# Altium PCB Main.PcbDoc
Units mm, origin at the board's own origin, x right, y up, seen from the top; angles counter-clockwise.
Board outline 144.19 x 139.09 mm, 3 copper layers (Top Layer, GND, Bottom Layer), stack 0.617 mm thick; 25 components, 20 nets, 103 pads, 1 vias.
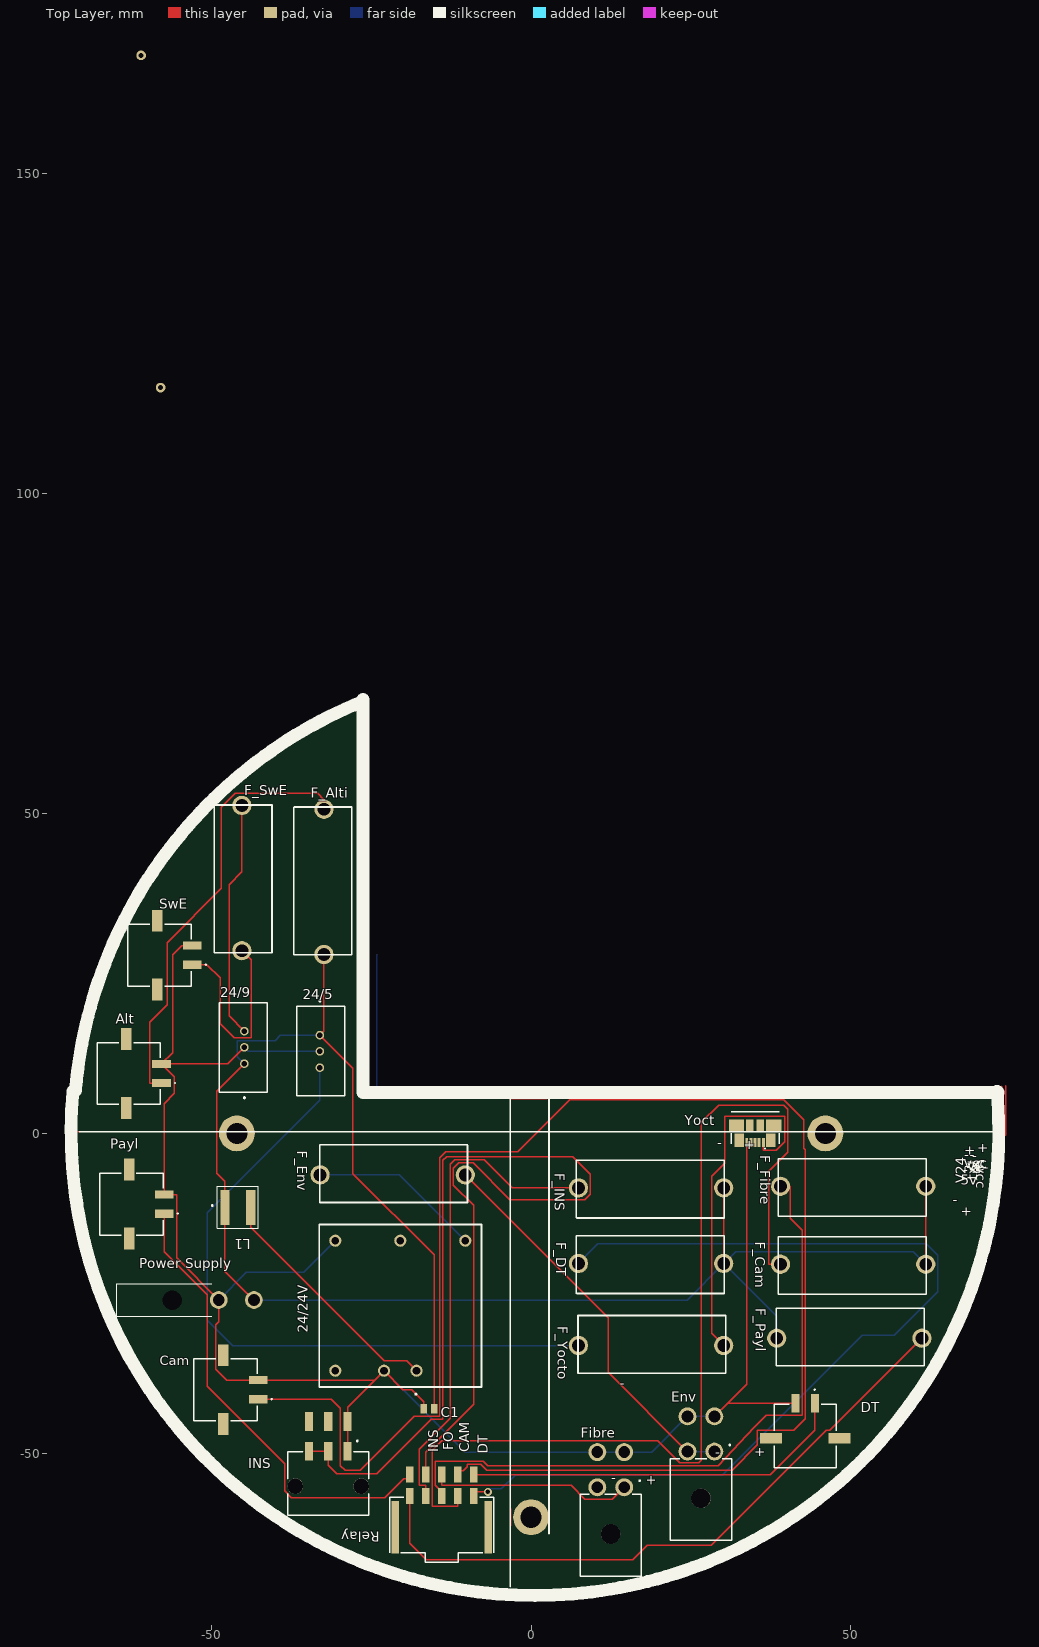
[diagram p0: Top Layer view]
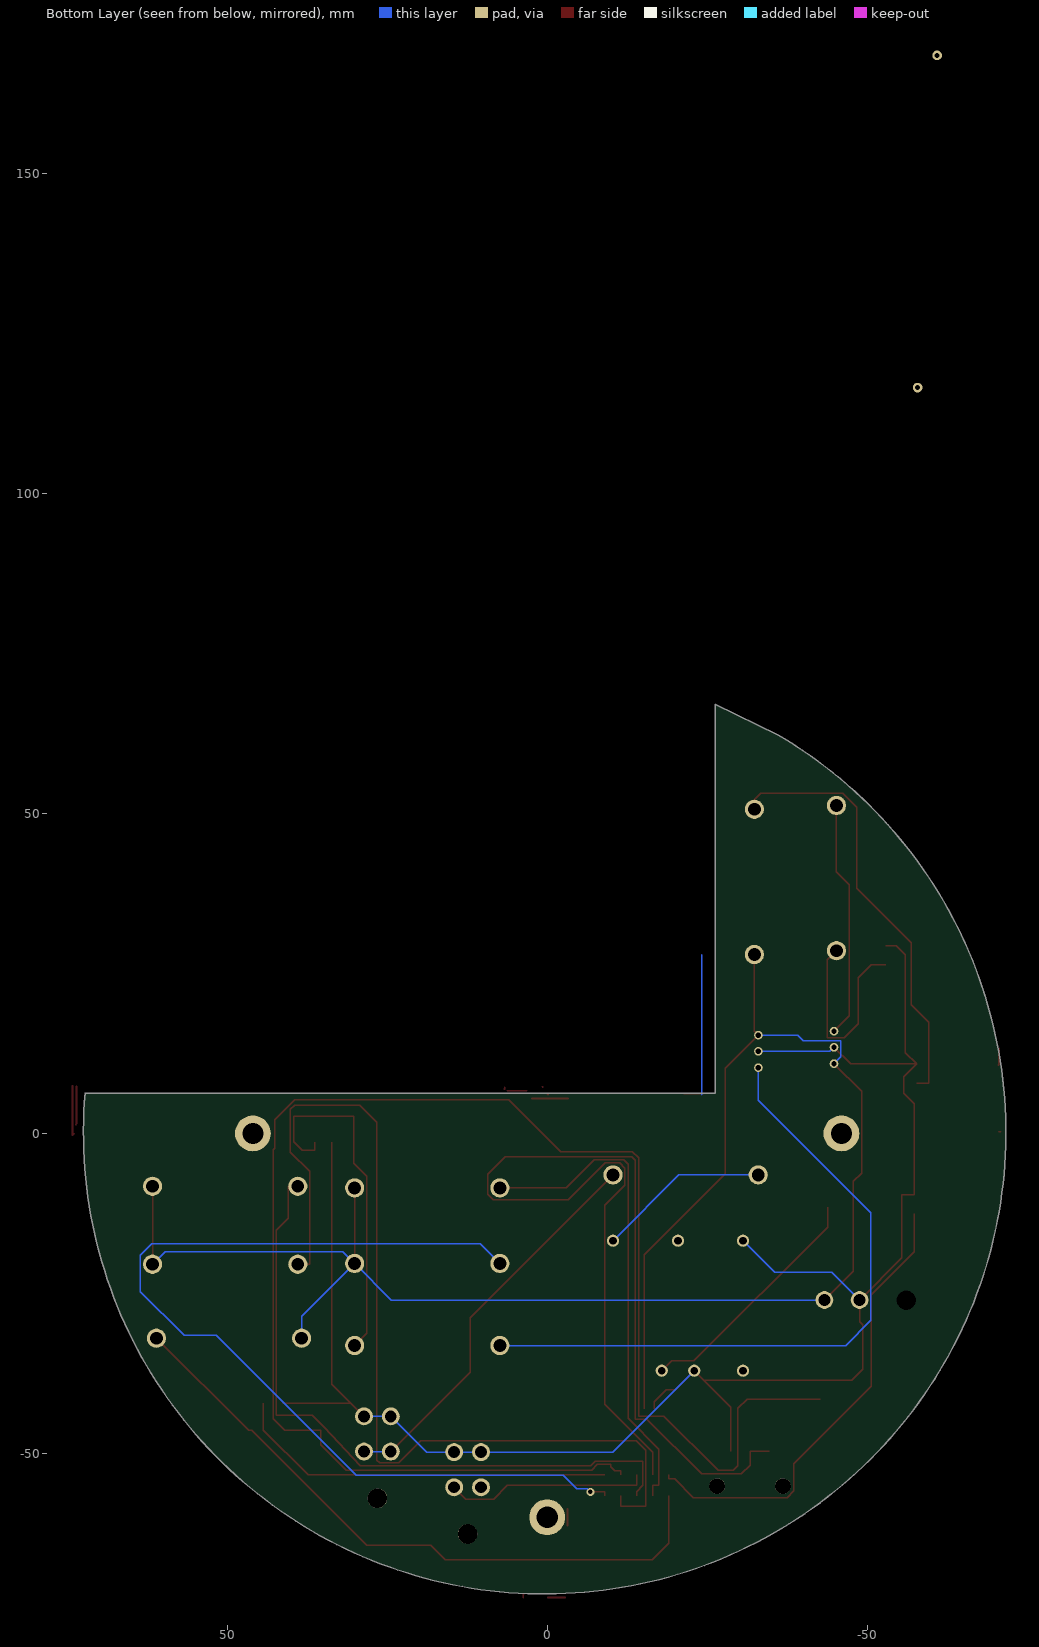
[diagram p1: Bottom Layer view, seen from below]
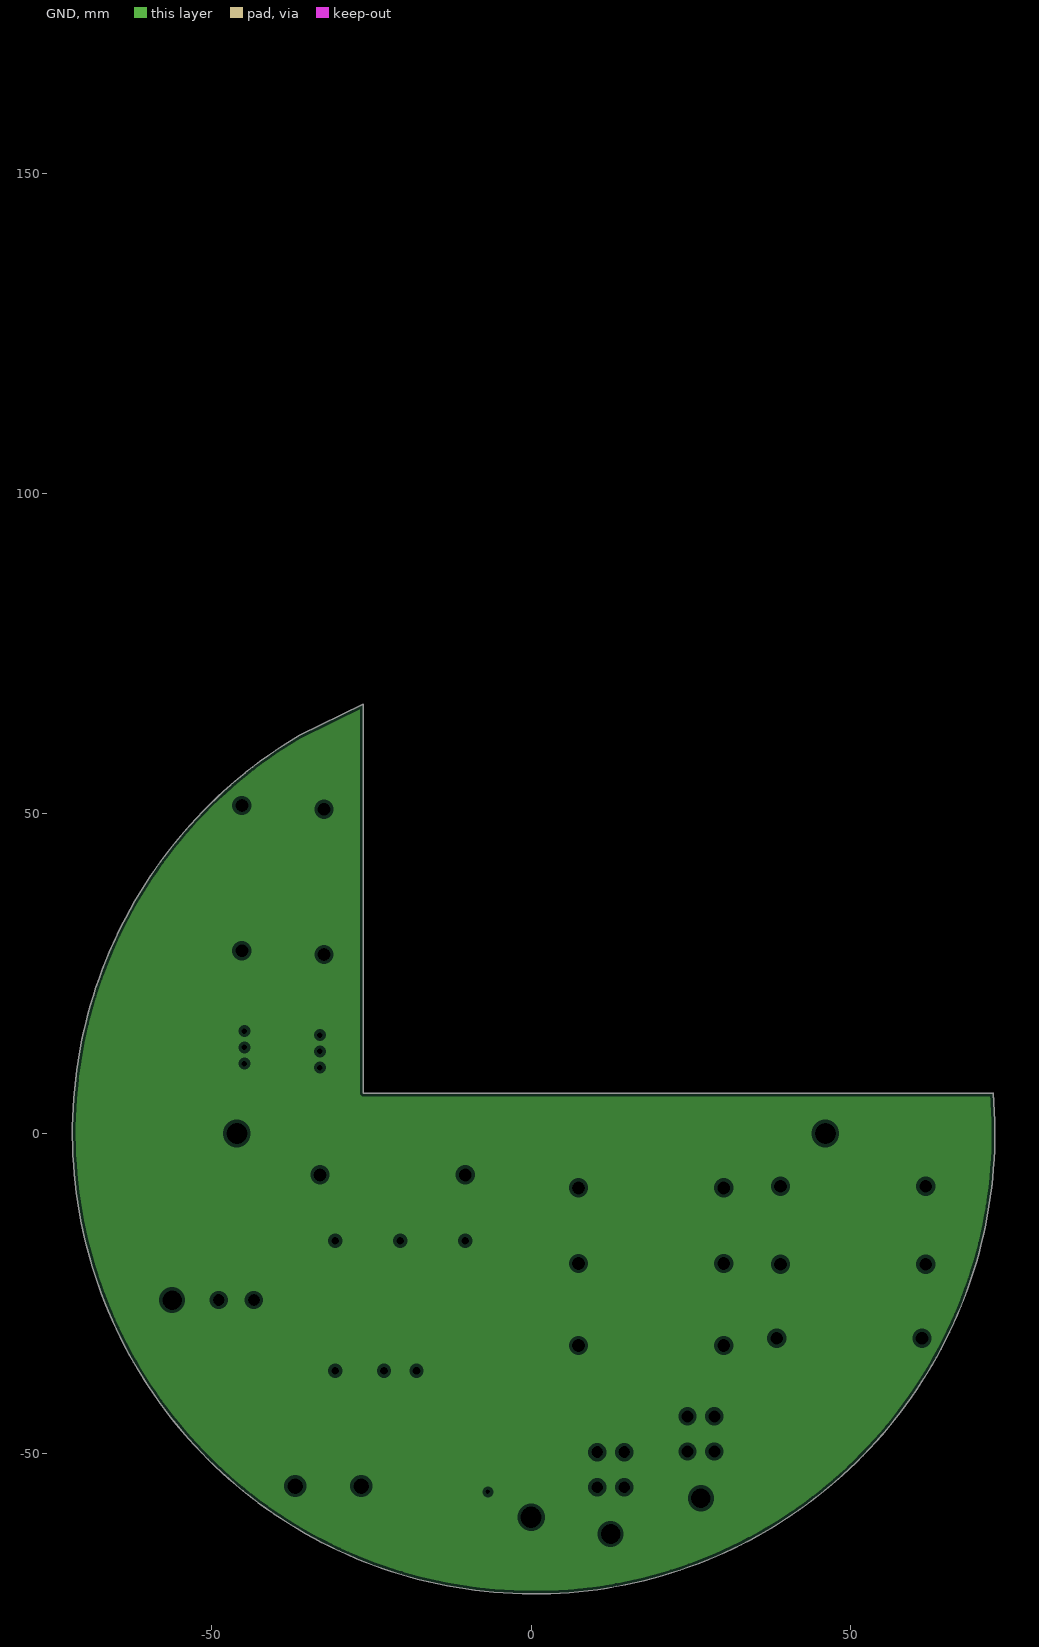
[diagram p2: GND, clearances drawn from the general rule]

## Layer stack, top to bottom
Top Solder: solder mask 0.0102, Solder Resist, Dk 3.5
Top Layer: signal copper 0.1
Dielectric 1: core 0.254, FR-4, Dk 4.2
GND: plane copper 0.036
Dielectric 2: prepreg 0.127, Dk 4.2
Bottom Layer: signal copper 0.1
Bottom Solder: solder mask 0.0102, Solder Resist, Dk 3.5

## Board outline
-26.247,6.319 -26.247,67.102 -36.183,62.237 ccw(c0.397,0.111) 72.224,6.319

## Design rules (kind name [scope] priority, off if disabled: settings)
Clearance [All] p1: gap=0.254 ignorepadtopadclearanceinfootprint=FALSE except(0: Arc-Hole Track-Hole SMDPad-Hole THPad-Hole Via-Hole Fill-Hole Poly-Hole Region-Hole Text-Hole)
PlaneClearance [All] p1: clearance=0.508
PlaneConnect [All] p1: planeconnectstyle=Relief reliefexpansion=0.508 reliefentries=4 reliefconductorwidth=0.254 reliefairgap=0.254
PolygonConnect [All] p1: connectstyle=Relief reliefconductorwidth=0.254 reliefentries=4 polygonreliefangle="90 Angle" airgapwidth=0.254
RoomDefinition Main [InComponentClass('Main')] p1 off: confinementstyle=ConfineIn formatcopy=TRUE lockcomponents=FALSE outline -73.542,-73.687 75.048,-73.687 75.048,70.712 -73.542,70.712
RoutingVias [All] p1: holewidth=0.711 width=1.27 viastyle="Through Hole" minholewidth=0.711 minwidth=1.27 maxholewidth=0.711 maxwidth=1.27
SMDNeckDown [All] p1: percent=100.000
SolderMaskExpansion [All] p1: expansion=0.102
Width "Schematic Width Constraint_1" [HasPad('24/5-2')] p1: maxlimit=0.3 minlimit=0.274 preferedwidth=0.275 minimp=50.000000 maximp=50.000000 favimp=50.000000
Width "Schematic Width Constraint" [HasPad('24/5-3')] p2: maxlimit=0.3 minlimit=0.274 preferedwidth=0.275 minimp=50.000000 maximp=50.000000 favimp=50.000000
Width Width_1 [All] p3 off: maxlimit=6 minlimit=6 preferedwidth=6 minimp=50.000000 maximp=50.000000 favimp=50.000000
Width [All] p4: maxlimit=0.225 minlimit=0.225 preferedwidth=0.225 minimp=50.000000 maximp=50.000000 favimp=50.000000
28 further rules are at their usual default settings.

## Components (designator, comment, footprint, x,y, rotation, side; value= is the part's Value field where it differs from the comment)
24/5 "TSR_2-2450" TSR-2 -29.13,19.867 r270 top
24/9 "TSR_2-2490" TSR-2 -48.721,6.422 r90 top
24/24V "THN_30-2415WI" THN_30 -20.447,-26.924 r0 top
Alt "43650-0212" 43650-0214 -67.855,9.374 r270 top (schematic designator Altimeter)
C1 "C0805S472K5RACAUTO" CAPC2012X88N -15.964,-43.053 r180 top
Cam "43650-0212" 43650-0214 -52.733,-40.056 r270 top (schematic designator Camera)
DT "43650-0212" 43650-0214 42.85,-52.225 r0 top (schematic designator Depth)
Env "26-01-3115" 39-30-1040 26.543,-63.623 r0 top (schematic designator Enviro)
F_Alti "FUSEHOLDERS PC Mount 5x20mm Fuses" "FUSEHOLDER 5x20" -32.385,27.973 r90 top (schematic designator F_Altimeter)
F_Cam "FUSEHOLDERS PC Mount 5x20mm Fuses" "FUSEHOLDER 5x20" 61.689,-20.447 r180 top
F_DT "FUSEHOLDERS PC Mount 5x20mm Fuses" "FUSEHOLDER 5x20" 30.099,-20.32 r180 top
F_Env "FUSEHOLDERS PC Mount 5x20mm Fuses" "FUSEHOLDER 5x20" -32.987,-6.477 r0 top
F_Fibre "FUSEHOLDERS PC Mount 5x20mm Fuses" "FUSEHOLDER 5x20" 61.689,-8.255 r180 top
F_INS "FUSEHOLDERS PC Mount 5x20mm Fuses" "FUSEHOLDER 5x20" 30.099,-8.509 r180 top
F_Payl "FUSEHOLDERS PC Mount 5x20mm Fuses" "FUSEHOLDER 5x20" 38.387,-32.004 r0 top (schematic designator F_Payload)
F_SwE "FUSEHOLDERS PC Mount 5x20mm Fuses" "FUSEHOLDER 5x20" -45.212,51.275 r270 top (schematic designator F_SwitchE)
F_Yocto "FUSEHOLDERS PC Mount 5x20mm Fuses" "FUSEHOLDER 5x20" 7.399,-33.147 r0 top
Fibre "26-01-3115" 39-30-1040 12.446,-69.211 r0 top
INS "43045-0606" 43045-0606 -31.702,-49.657 r0 top
L1 "XEL6060-222MEB" XAL6060153MEC -45.847,-11.557 r0 top
Payl "43650-0212" 43650-0214 -67.437,-11.049 r270 top (schematic designator Payload)
"Power Supply" "76825-0002" 768250002 -54.034,-26.035 r270 top
Relay "105405-1110" 105405-1110 -13.97,-65.54 r0 top
SwE "43650-0212" 43650-0214 -63.02,27.864 r270 top (schematic designator SwitchE)
Yoct "47346-0001" 47346-0001 35,3.42 r0 top (schematic designator 5V)

## Footprints (in the part's own frame and the unit in brackets; to place one, negate y for a bottom-side part, rotate by r counter-clockwise, add the part's x,y. Pads: shape width x height; smd on the part's side, far side on the other; paste and mask are expansions set on the pad)
39-30-1040 [mm]
  round 2.8 hole 1.85: 1(2.1,13.9) 2(-2.1,13.9) 3(2.1,19.4) 4(-2.1,19.4)
  round 3.05 hole 3.05 unplated: 5(0,6.6)
  silkscreen extent -4.8,0 4.8,15.02, body extent -4.93,0 5.07,19.94, height 12.4
43045-0606 [mm]
  rect 1.27x2.92 smd: 1(3,0) 2(0,0) 3(-3,0) 4(3,4.63) 5(0,4.63) 6(-3,4.63)
  round 2.46 hole 2.46 unplated: 7(-5.15,-5.47) 8(5.15,-5.47)
  silkscreen extent -6.33,-9.99 6.33,1.69, body extent -6.57,-10.16 6.58,5.24, height 8.83
43650-0214 [mm]
  rect 1.27x2.92 smd: 1(1.5,10.07) 2(-1.5,10.07)
  rect 3.43x1.65 smd: 3(-5.385,4.6) 4(5.385,4.6)
  silkscreen extent -4.83,0 4.83,12.24, body extent -6.82,0 6.83,10.74, height 5.64
47346-0001 [mm]
  rect 0.45x1.38 smd: 1(1.3,-4.81) 2(0.65,-4.81) 3(0,-4.81) 4(-0.65,-4.81) 5(-1.3,-4.81)
  rect 1.475x2.1 smd: 6(-2.453,-4.45) 7(2.452,-4.45)
  rect 1.175x1.9 smd: 8(0.837,-2.15) 9(-0.837,-2.15)
  rect 2.375x1.9 smd: 10(2.913,-2.15) 11(-2.913,-2.15)
  silkscreen extent -3.75,-5.84 3.75,0, body extent -3.99,-5.19 3.99,0.24, height 2.77
105405-1110 [mm]
  rect 1.24x2.5 smd: 1(-5,8.898) 2(-5,12.198) 3(-2.5,8.898) 4(-2.5,12.198) 5(0,8.898) 6(0,12.198) 7(2.5,8.898) 8(2.5,12.198) 9(5,8.898) 10(5,12.198)
  rect 1.1x8.2 smd: 11(7.27,3.968) 12(-7.27,3.968)
  silkscreen extent -8.12,-1.46 8.12,8.69, body extent -8.42,-1.64 7.82,13.1, height 9.5
768250002 [mm]
  round 2.775 hole 1.85: 1(0,10.7) 2(0,5.2)
  round 1.525 hole 3.05 unplated: 3(0,-2.1)
  silkscreen extent -2.54,-10.7 2.54,4.1, body extent -4.16,-10.73 4.19,11.23, height 14.25
CAPC2012X88N [mm]
  rect 1.02x1.47 smd: 1(-0.8,0) 2(0.8,0)
  body extent -1,-0.63 1,0.63, height 0.88
"FUSEHOLDER 5x20" [mm]
  round 3 hole 2: 1(0,0) 2(22.7,0)
  silkscreen extent -0.06,-4.32 23.05,4.7, body extent -0.08,-4.31 23.08,4.69, height 13.44
THN_30 [mm]
  round 1.9 hole 1.2: 1(2.54,-10.16) 2(-2.54,-10.16) 3(10.16,10.16) 4(0,10.16) 5(-10.16,10.16) 6(-10.16,-10.16)
  silkscreen extent -12.7,-13.94 12.7,12.7, body extent -12.7,-12.7 12.7,12.7, height 11.4
TSR-2 [mm]
  round 1.35 hole 0.85: 1(4.5,-3.89) 2(7.04,-3.89) 3(9.58,-3.89)
  silkscreen extent -0.96,-7.5 14,0, body extent -0.01,-7.43 13.99,0.07, height 10
XAL6060153MEC [mm]
  rect 1.43x5.5 smd: 1(-2.02,0) 2(2.02,0)
  silkscreen extent -4.1,-3.28 3.18,3.28, body extent -3.28,-3.38 3.28,3.38, height 6

## Part data
24/5: "Power Supply", Manufacturer_Name="Traco Power", Manufacturer_Part_Number="TSR 2-2450", Mouser Part Number=495-TSR2-2450, Datasheet Link="https://componentsearchengine.com/Datasheets/1/TSR 2-2450.pdf", Mouser Price/Stock=https://www.mouser.com/Search/Refine.aspx?Keyword=495-TSR2-2450
24/9: "Power Supply", Manufacturer_Name="Traco Power", Manufacturer_Part_Number="TSR 2-2490", Mouser Part Number=495-TSR2-2490, Datasheet Link="https://componentsearchengine.com/Datasheets/1/TSR 2-2490.pdf", Mouser Price/Stock=https://www.mouser.com/Search/Refine.aspx?Keyword=495-TSR2-2490
24/24V: "Power Supply", Manufacturer_Name="Traco Power", Manufacturer_Part_Number="THN 30-2415WI", Mouser Part Number=495-THN30-2415WI, Datasheet Link="https://componentsearchengine.com/Datasheets/1/THN 30-2415WI.pdf", Mouser Price/Stock=https://www.mouser.com/Search/Refine.aspx?Keyword=495-THN30-2415WI
Alt Cam DT Payl SwE: "Connector", Manufacturer_Name=Molex, Mouser Part Number=538-43650-0212, Datasheet Link=https://componentsearchengine.com/Datasheets/1/43650-0212.pdf, Manufacturer_Part_Number=43650-0212, Mouser Price/Stock=https://www.mouser.com/Search/Refine.aspx?Keyword=538-43650-0212
C1: "Capacitor", Manufacturer_Name=Kemet, Mouser Part Number=80-C0805S472K5RAUTO, Datasheet Link=https://componentsearchengine.com/Datasheets/1/C0805S472K5RACAUTO.pdf, Height=0.88mm, Manufacturer_Part_Number=C0805S472K5RACAUTO, Mouser Price/Stock=https://www.mouser.com/Search/Refine.aspx?Keyword=80-C0805S472K5RAUTO
Env Fibre: "Connector", Manufacturer_Name=Molex, Mouser Part Number=538-26-01-3115, Datasheet Link=https://componentsearchengine.com/Datasheets/1/26-01-3115.pdf, Manufacturer_Part_Number=26-01-3115, Mouser Price/Stock=https://www.mouser.com/Search/Refine.aspx?Keyword=538-26-01-3115
INS: "Connector", Manufacturer_Name=Molex, Mouser Part Number=538-43045-0606, Datasheet Link=https://componentsearchengine.com/Datasheets/1/43045-0606.pdf, Manufacturer_Part_Number=43045-0606, Mouser Price/Stock=https://www.mouser.com/Search/Refine.aspx?Keyword=538-43045-0606
L1: "Inductor", Manufacturer_Name=COILCRAFT, Mouser Part Number=994-XEL6060-222MEB, Datasheet Link=https://componentsearchengine.com/Datasheets/1/XEL6060-222MEB.pdf, Manufacturer_Part_Number=XEL6060-222MEB, Mouser Price/Stock=https://www.mouser.com/Search/Refine.aspx?Keyword=994-XEL6060-222MEB
"Power Supply": "Connector", Manufacturer_Name=Molex, Mouser Part Number=538-76825-0002, Datasheet Link=https://componentsearchengine.com/Datasheets/1/76825-0002.pdf, Height=14mm, Manufacturer_Part_Number=76825-0002, Mouser Price/Stock=https://www.mouser.com/Search/Refine.aspx?Keyword=538-76825-0002
Relay: "Connector", Manufacturer_Name=Molex, Mouser Part Number=538-105405-1110, Datasheet Link=https://componentsearchengine.com/Datasheets/1/105405-1110.pdf, Manufacturer_Part_Number=105405-1110, Mouser Price/Stock=https://www.mouser.com/Search/Refine.aspx?Keyword=538-105405-1110
Yoct: "Connector", Manufacturer_Name=Molex, Mouser Part Number=538-47346-0001, Datasheet Link=https://componentsearchengine.com/Datasheets/1/47346-0001.pdf, Manufacturer_Part_Number=47346-0001, Mouser Price/Stock=https://www.mouser.com/Search/Refine.aspx?Keyword=538-47346-0001

## Free pads (board coordinates)
  round 5.6 hole 3.3: 0(-46,0) 0(0,-60) 0(46,0)
  round 1.524 hole 0.762: 2(-57.912,116.586) 3(-60.96,168.529)

## Via types
v1: diameter 1.27, hole 0.711, Top Layer to Bottom Layer, 1 vias

## Nets (pads, with @x,y where several pads share a name; then routed paths per layer and width w, separated by ;. In a path a pad name is that pad's centre, name@x,y a point inside that pad or via, vN(x,y) a via of type N, cw(c..) or ccw(c..) an arc to the next point about the centre after c; other vN are vias at no path point)
GND: 24/5.2 24/9.2 24/24V.2 24/24V.5 "Power Supply.2" Alt.2 C1.2 Cam.2 DT.2 Env.3 Env.4 Fibre.3 Fibre.4 INS.1 INS.4 Payl.2 SwE.2 Yoct.5 | length 288.4
  Top Layer w0.225: SwE.2 -54.583,29.364 -56.007,27.94 -56.007,12.652 Alt.2 ; 24/9.2 -47.419,10.874 Alt.2 ; INS.1 INS.4 -28.702,-42.799 -24.459,-38.556 ; C1.2 -16.764,-41.91 -18.644,-40.03 -20.041,-40.03 24/24V.2 -24.459,-38.556 ; Env.3 30.711,-42.155 ; Yoct.5 33.7,-39.166 30.711,-42.155 ; DT.2 30.711,-42.155 ; Alt.2 -55.753,8.842 -55.753,6.302 -57.379,4.676 -57.379,-9.549 Payl.2 -55.423,-9.549 -55.423,-19.446 -48.834,-26.035 -48.834,-29.439 -49.327,-29.931 -49.327,-36.83 -47.601,-38.556 Cam.2 -24.459,-38.556
  Bottom Layer w0.225: -48.834,-26.035 -44.516,-21.717 -35.56,-21.717 24/24V.5 ; 24/9.2 -44.196,12.827 24/5.2 ; 24/24V.2 -10.26,-49.811 Fibre.4 Fibre.3 18.855,-49.811 Env.4 Env.3
Net24/24V_1: 24/24V.1 L1.2 | length 38.3
  Top Layer w0.225: L1.2 -43.827,-14.63 -22.923,-35.535 -19.456,-35.535 24/24V.1
NetF_Cam_2: F_Cam.2 Relay.7 | length 153.7
  Top Layer w0.225: Relay.7 -11.47,-58.259 -15.443,-58.259 -15.443,-49.53 -13.945,-48.031 19.761,-48.031 23.219,-51.49 26.213,-51.49 26.619,-51.083 26.619,1.727 29.337,4.445 39.497,4.445 40.132,3.81 40.132,-2.921 37.109,-5.944 37.109,-20.447 F_Cam.2
NetF_DT_2: F_DT.2 Relay.9 | length 150
  Top Layer w0.225: Relay.9 -8.97,-56.007 -6.782,-56.007 v1(-6.756,-56.032)
  Bottom Layer w0.225: v1(-6.756,-56.032) -6.299,-55.575 -4.648,-55.575 -2.515,-53.442 29.845,-53.442 51.74,-31.547 56.744,-31.547 63.576,-24.714 63.576,-19.05 61.798,-17.272 10.447,-17.272 F_DT.2
NetF_Fibre_2: F_Fibre.2 Relay.5 | length 104.9
  Top Layer w0.225: Relay.5 -13.97,-56.007 -14.961,-55.016 -14.961,-51.246 -7.504,-51.246 -6.782,-51.969 29.235,-51.969 34.873,-45.923 36.761,-44.036 42.367,-44.036 42.367,-15.113 40.513,-13.259 40.513,-8.255 F_Fibre.2
NetF_INS_2: F_INS.2 Relay.3 | length 77
  Top Layer w0.225: Relay.3 -16.47,-54.991 -17.475,-54.991 -17.475,-49.334 -12.633,-44.491 -12.633,-4.826 -11.938,-4.131 -7.349,-4.131 -2.972,-8.509 F_INS.2
NetF_Payload_2: F_Payl.2 Relay.1 | length 102.9
  Top Layer w0.225: Relay.1 -18.97,-64.088 -16.383,-66.675 15.9,-66.675 18.186,-64.389 28.194,-64.389 46.152,-46.431 46.66,-46.431 F_Payl.2
VCC: 24/5.1 24/9.1 "Power Supply.1" C1.1 F_Alti.1 F_Cam.1 F_DT.1 F_Fibre.1 F_INS.1 F_Payl.1 L1.1 | length 285.2
  Top Layer w0.225: 24/9.1 -49.174,6.579 -49.174,-6.198 -47.867,-7.505 L1.1 -47.867,-21.502 -43.334,-26.035 ; F_Alti.1 -32.385,16.002 24/5.1 -27.864,10.211 -27.864,-6.274 -15.164,-18.974 C1.1 ; F_DT.1 F_INS.1 ; F_Cam.1 F_Fibre.1
  Bottom Layer w0.225: 24/9.1 -45.898,11.989 -45.898,14.529 -40.03,14.529 -39.192,15.367 24/5.1 ; -43.334,-26.035 24.384,-26.035 F_DT.1 ; F_Payl.1 38.387,-28.608 F_DT.1 ; F_Cam.1 59.708,-18.466 31.953,-18.466 F_DT.1
VCC_5V: 24/5.3 F_Yocto.1 | length 106.4
  Bottom Layer w0.225: 24/5.3 -33.02,5.156 -50.597,-12.421 -50.597,-29.21 -46.66,-33.147 F_Yocto.1
VCC_9V: 24/9.3 F_SwE.1 | length 37.1
  Top Layer w0.225: F_SwE.1 -45.212,40.894 -47.193,38.913 -47.193,18.364 24/9.3
VCC_24V: 24/24V.3 F_Env.1 | length 27
  Bottom Layer w0.225: F_Env.1 -20.574,-6.477 24/24V.3
VCC_AL: Alt.1 F_Alti.2 | length 68.4
  Top Layer w0.225: Alt.1 -59.614,7.874 -59.614,17.399 -56.871,20.142 -56.871,29.845 -48.412,38.303 -48.412,50.978 -46.228,53.162 -33.35,53.162 -32.385,52.197 F_Alti.2
VCC_CAM: Cam.1 Relay.8 | length 251.5
  Top Layer w0.225: Cam.1 -31.24,-41.556 -29.82,-42.977 -29.82,-51.918 -29.083,-52.654 -26.721,-52.654 -18.237,-44.171 -14.275,-44.171 -14.275,-3.81 -13.31,-2.845 -2.083,-2.845 6.045,5.283 39.497,5.283 42.621,2.159 42.621,-2.337 42.85,-2.565 42.85,-44.602 41.021,-46.431 35.382,-46.431 35.382,-48.692 31.445,-52.629 -6.934,-52.629 -7.838,-51.725 -9.957,-51.725 -9.957,-52.07 -10.592,-52.705 -11.47,-52.705 Relay.8
VCC_DT: DT.1 Relay.10 | length 60.5
  Top Layer w0.225: Relay.10 -8.97,-53.365 37.39,-53.365 44.35,-46.406 DT.1
VCC_ENV: Env.1 Env.2 F_Env.2 | length 61.8
  Top Layer w0.225: F_Env.2 12.04,-28.804 12.04,-37.32 Env.2
  Bottom Layer w0.225: Env.2 Env.1
VCC_FO: Fibre.1 Relay.6 | length 31.8
  Top Layer w0.225: Relay.6 -13.97,-55.016 6.248,-55.016 8.382,-57.15 12.707,-57.15 Fibre.1
VCC_INS: INS.2 INS.3 Relay.4 | length 172.1
  Top Layer w0.225: INS.3 INS.2 -31.702,-51.864 -30.353,-53.213 -24.159,-53.213 -15.596,-44.65 -13.796,-44.65 -13.796,-4.195 -13.208,-3.607 6.528,-3.607 9.271,-6.35 9.271,-9.525 8.407,-10.389 -3.302,-10.389 -9.08,-4.61 -11.303,-4.61 -12.154,-5.461 -12.154,-8.065 -8.966,-11.252 -8.966,-42.291 -16.47,-49.795 Relay.4
VCC_PL: Payl.1 Relay.2 | length 73
  Top Layer w0.225: Payl.1 -57.379,-12.549 -57.379,-18.491 -50.622,-25.248 -50.622,-39.548 -38.532,-51.638 -38.532,-55.88 -37.49,-56.921 -22.86,-56.921 -19.939,-54 -18.97,-54 Relay.2
VCC_SW: F_SwE.2 SwE.1 | length 32.4
  Top Layer w0.225: SwE.1 -50.673,26.364 -48.616,24.307 -48.616,17.145 -46.406,14.935 -43.764,14.935 -43.764,27.127 F_SwE.2
VCC_Yocto: F_Yocto.2 Yoct.1 | length 56.1
  Top Layer w0.225: F_Yocto.2 28.219,-31.267 28.219,-6.655 30.251,-4.623 30.251,2.718 39.649,2.718 39.649,-1.295 38.303,-2.642 36.3,-2.642 Yoct.1
pads on no net: 24/24V.4 24/24V.6 "Power Supply.3" Alt.3 Alt.4 Cam.3 Cam.4 DT.3 DT.4 Env.5 Fibre.2 Fibre.5 INS.5 INS.6 INS.7 INS.8 Payl.3 Payl.4 Relay.11 Relay.12 SwE.3 SwE.4 Yoct.2 Yoct.3 Yoct.4 Yoct.6 Yoct.7 Yoct.8 Yoct.9 Yoct.10 Yoct.11
copper on no net: | length 57.6
  Top Layer w0.254: -70.866,0.254 -70.612,0.254 ; -70.621,13.308 -70.621,10.768 -70.494,10.641 ; -24.345,6.196 -21.345,6.196 ; -3.254,5.413 -3.302,5.461 2.413,5.461 ; -3.181,-61.318 -3.181,-58.682 ; -2.803,-72.544 -0.092,-72.544 ; -0.127,6.096 0,6.223 ; 0.677,7.227 0.733,7.283 ; 3.217,6.704 6.217,6.704 ; 3.677,-71.988 3.725,-72.036 3.725,-72.544 ; 6.631,7.227 6.631,7.008 6.725,6.914 ; 73.575,7.339 73.575,1.497 73.702,1.37 ; 73.956,-0.027 74.21,-0.281 74.21,7.466 ; 0.733,-59.773 ccw(c0.677,-59.773) 0.733,-59.773
  Bottom Layer w0.254: -24.139,6.069 -24.139,27.913

## Polygon pours and split planes (outlines as drawn)
no net on GND (split plane): 268 vertices, not listed, extent -71.19,-71.476 71.984,66.284

## Silkscreen, mask and mechanical layers (free items; w line width, h text height)
Top Overlay:
  lines w0.254: -70.612,0.254 0,0.254 72.263,0.254 ; -3.254,-70.866 -3.254,5.413 ; 2.794,-62.6 2.794,5.461
  lines w2: -71.628,6.604 ccw(c0.596,0.285) 72.82,6.604 ; -71.228,6.703 cw(c0.893,0.471) -26.289,67.564 ; -26.289,67.818 -26.289,6.419 73.028,6.419
  text "-" at 29.074,-2.186 h1.52
  text "+" at 33.265,-2.44 h1.52
  text "+" at 69.723,-2.921 h1.52
  text "+" at 67.691,-3.302 h1.52
  text "-" at 67.691,-4.064 h1.52
  text "-" at 68.58,-4.064 h1.52
  text "-" at 68.961,-4.191 h1.52
  text "-" at 70.231,-4.826 h1.52
  text "-" at 68.199,-5.08 h1.52
  text "vcc" at 69.596,-5.08 h1.52 r270
  text "-" at 68.58,-5.207 h1.52
  text "vcc" at 67.691,-5.461 h1.52
  text "-" at 67.818,-5.715 h1.52
  text "-" at 67.818,-5.715 h1.52
  text "+" at 69.088,-5.715 h1.52
  text "vC" at 68.199,-5.842 h1.52
  text "-" at 70.739,-5.969 h1.52
  text "-" at 67.564,-6.35 h1.52
  text "-" at 69.469,-6.35 h1.52
  text "rx" at 70.231,-6.35 h1.52 r90
  text "tx" at 69.723,-7.239 h1.52 r90
  text "-" at 67.564,-7.62 h1.52
  text "V24" at 67.945,-7.747 h1.52 r90
  text "5v" at 67.183,-8.001 h1.52
  text "-" at 65.913,-11.049 h1.52
  text "+" at 67.183,-12.827 h1.52
  text "-" at 13.834,-39.778 h1.52
  text "FO" at -12.201,-49.557 h1.52 r90
  text "INS" at -14.487,-49.811 h1.52 r90
  text "CAM" at -9.661,-49.811 h1.52 r90
  text "DT" at -6.74,-50.065 h1.52 r90
  text "+" at 34.916,-50.446 h1.52
  text "-" at 28.82,-50.573 h1.52
  text "+" at 18.152,-53.367 h1.52 r270
  text "-" at 12.564,-54.51 h1.52